# Altium PCB BEAR4.PcbDoc (part 2 of 3)
Units mm, origin at the board's own origin, x right, y up, seen from the top; angles counter-clockwise.
Board outline 83.43 x 40.25 mm, 4 copper layers (Top Layer, Layer 1, Layer 2, Bottom Layer), stack 0.8 mm thick; 156 components, 110 nets, 501 pads, 382 vias.
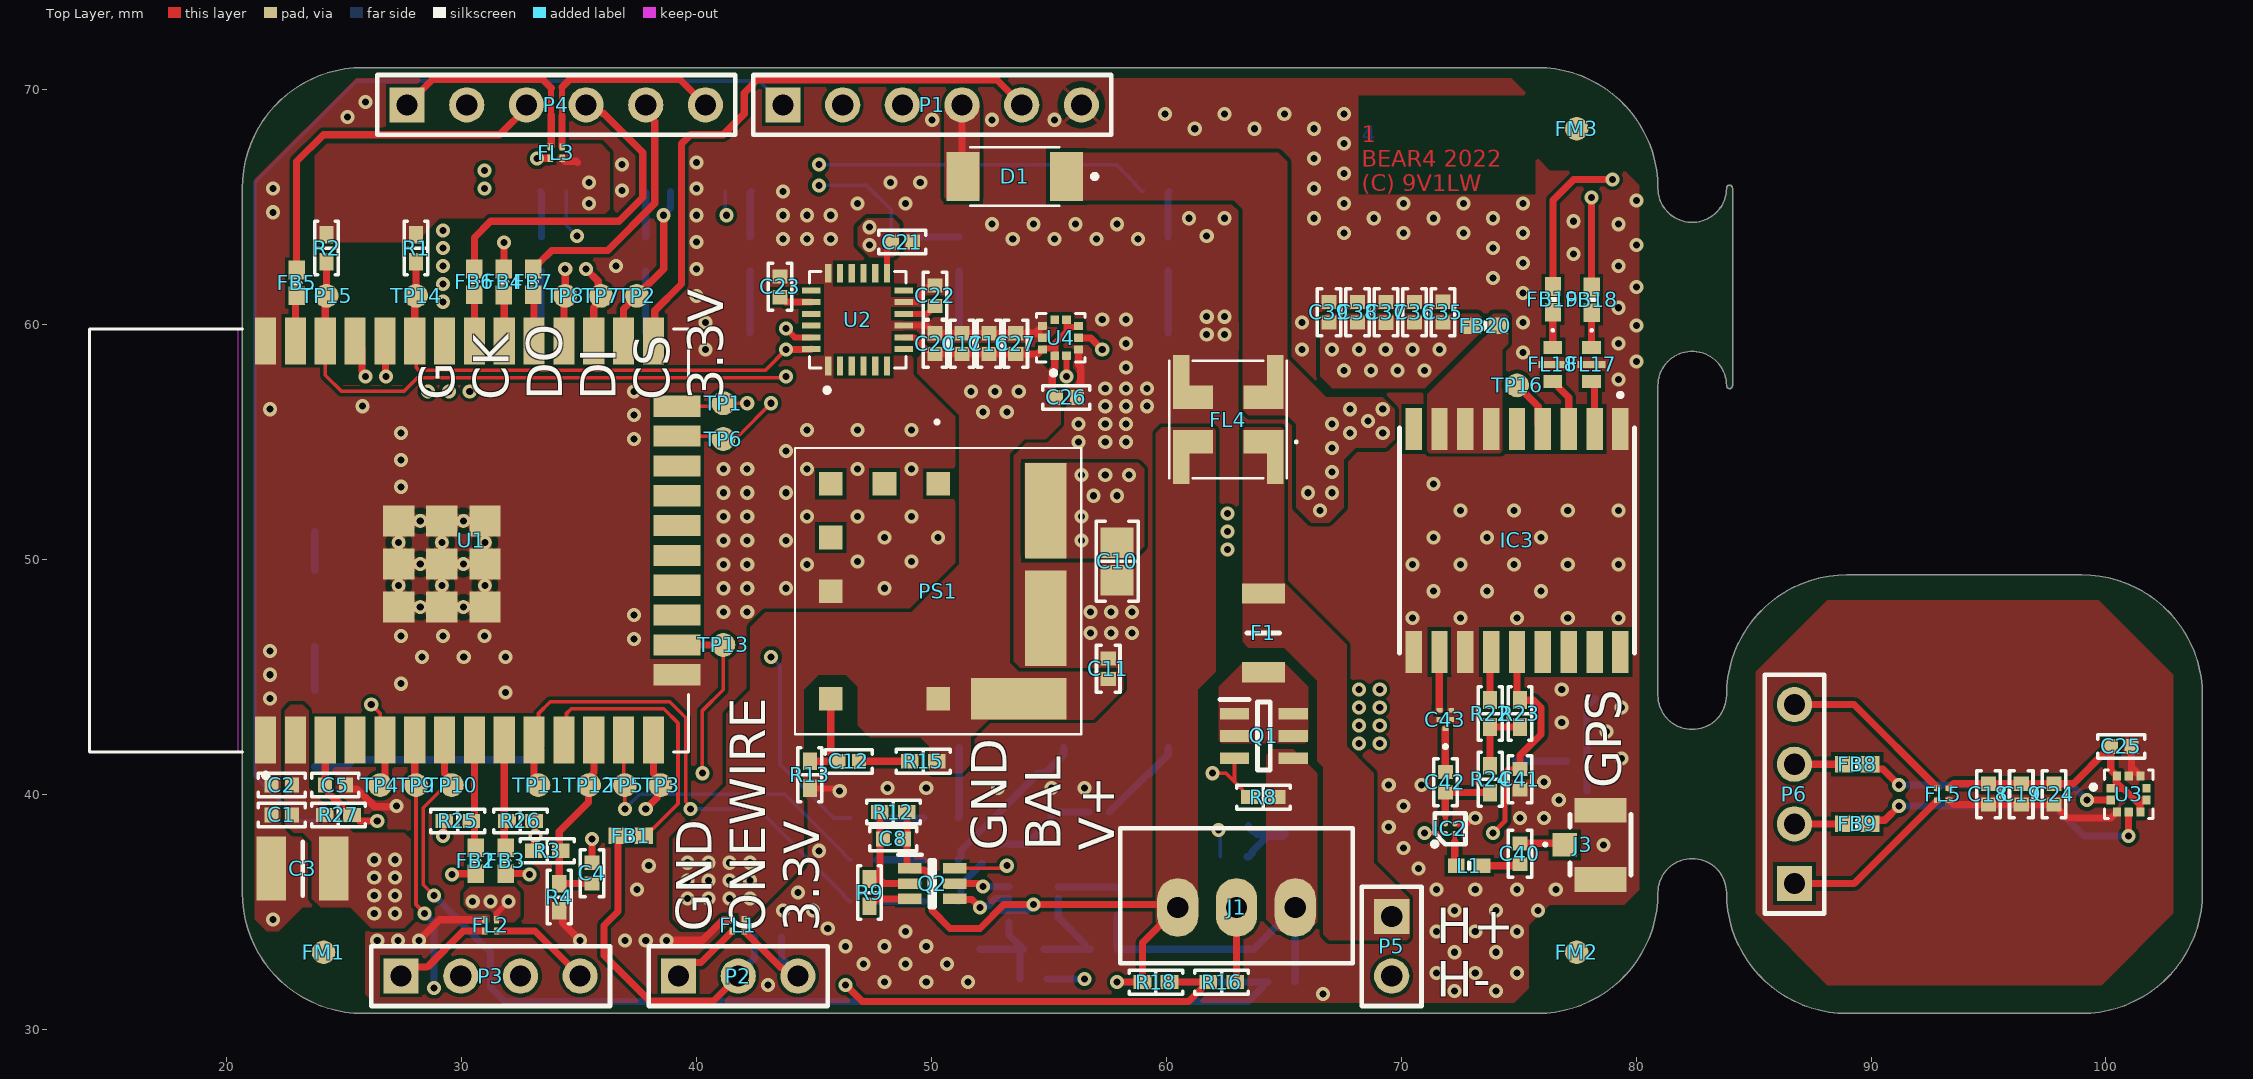
[diagram p0: Top Layer view]

## Via types
v1: diameter 0.6, hole 0.3, Top Layer to Bottom Layer, tented both sides, 382 vias

## Nets (pads, with @x,y where several pads share a name; then routed paths per layer and width w, separated by ;. In a path a pad name is that pad's centre, name@x,y a point inside that pad or via, vN(x,y) a via of type N, cw(c..) or ccw(c..) an arc to the next point about the centre after c; other vN are vias at no path point) (continued)
BATT_GND: (continued)
  Bottom Layer w0.305: C9.1@52.07,34.281 52.09,34.281 52.863,35.054 53.304,35.054 IC1.6@53.306,35.056 54.106,35.056 v1(54.356,35.306) ; v1(57.912,32.004) R19.1@58.988,32.004
BATT_PROTECTED: F1.2 FL4.1 FL4.5 P5.1
CELL1_V: R16.1 R18.1 TP9.1 U1.6 | length 46.6
  Top Layer w0.152: TP9.1@28.067,40.386 28.067,35.306 28.427,34.946 v1(28.427,34.925)
  Top Layer w0.305: U1.6@28.014,42.3 28.014,40.439 TP9.1@28.067,40.386 ; v1(46.355,31.877) 47.057,31.175 60.953,31.175 61.559,31.781 61.559,31.856 R16.1@61.707,32.004 ; R18.1@60.138,32.004 R16.1@61.707,32.004 ; R16.1@61.782,32.004 R16.1@61.707,32.004
  Layer 1 w0.305: v1(28.829,31.75) 29.404,31.175 45.653,31.175 v1(46.355,31.877)
  Bottom Layer w0.305: v1(28.427,34.925) 28.829,34.523 v1(28.829,31.75)
CELL2_V: R17.2 R19.2 TP10.1 U1.7 | length 50.3
  Top Layer w0.152: v1(28.829,35.687) 28.372,36.144 28.372,39.421 29.096,40.145 29.116,40.145 29.357,40.386 TP10.1@29.591,40.386
  Top Layer w0.305: U1.7@29.284,42.3 29.284,40.885 29.591,40.578 TP10.1@29.591,40.386
  Bottom Layer w0.305: v1(28.829,35.687) 31.242,33.274 31.242,31.78 31.847,31.175 63.493,31.175 64.099,31.781 64.099,31.856 R17.2@64.247,32.004 ; R19.2@60.138,32.004 R17.2@64.247,32.004 ; R17.2@64.322,32.004 R17.2@64.247,32.004
GND: C1.1 C2.1 C3.2 C5.1 C10.1 C11.1 C13.1 C14.1 C16.1 C17.1 C20.1 C21.1 C22.1 C23.1 C26.1 C27.1 C28.1 C29.1 C30.1 C31.1 C32.2 C33.2 C35.1 C36.1 C37.1 C38.1 C39.1 C41.1 C43.2 C43.3 C43.5 FL1.4 FL2.4 FL3.3 FL4.3 FL4.7 FL6.4 FL7.4 FL8.4 FL9.4 FL10.4 FL11.2 FL11.4 FL12.2 FL12.4 FL13.4 FL14.4 FL15.4 FL17.4 FL18.4 IC2.B2 IC3.1 IC3.10 IC3.12 J2.2 J2.3 J3.2 J3.3 P1.6 PS1.3 PS1.7 PS2.3 PS2.7 R4.1 R13.1 R20.2 R29.1 U1.1 U1.15 U1.38 U1.39_1 U1.39_2 U1.39_3 U1.39_4 U1.39_5 U1.39_6 U1.39_7 U1.39_8 U1.39_9 U1.39_10 U1.39_11 U1.39_12 U1.39_13 U1.39_14 U1.39_15 U1.39_16 U1.39_17 U1.39_18 U1.39_19 U1.39_20 U1.39_21 U2.1 U2.9 U2.11 U2.18 U4.3 U4.8 U4.9 U5.9 U5.10 U5.11 U5.P1 U5.P2 U5.P3 | length 23.9
  Top Layer w0.203: IC2.B2@72.282,38.735 72.835,38.735 73.089,38.989 v1(73.152,38.989)
  Top Layer w0.254: R13.1@44.831,40.252 45.887,40.252 46.007,40.132 v1(46.101,40.132) ; U2.9@48.833,59.948 49.823,59.948 49.972,59.799 C20.1@49.972,59.795 ; U2.11@48.833,60.948 49.381,60.948 49.53,61.097 49.53,61.341 49.784,61.595 50.106,61.595 C22.1@50.165,61.654
  Top Layer w0.305: C5.1@25.078,40.386 25.078,40.366 25.226,40.218 25.561,40.218 26.312,39.467 27.203,39.467 v1(27.233,39.497) ; v1(28.194,33.782) 29.069,34.657 FL2.4@30.992,34.657 ; v1(33.218,67.056) 33.232,67.07 FL3.3@33.786,67.07 ; R4.1@34.163,35.045 34.311,34.897 34.311,34.523 v1(35.052,33.782) ; v1(38.735,33.782) 40.259,33.782 41.134,34.657 FL1.4@41.533,34.657 ; C20.1@49.972,59.795 50.145,59.622 C20.1@50.165,59.622 C17.1@51.308,59.622 C16.1@52.451,59.622 C27.1@53.594,59.622 54.427,59.622 ; U4.9@54.738,59.433 54.723,59.433 54.534,59.622 54.427,59.622 ; U4.8@54.738,59.933 54.723,59.933 54.675,59.885 54.675,59.87 54.427,59.622 ; C26.1@56.193,56.896 56.341,57.044 56.341,57.517 56.358,57.534 56.358,58.178 56.268,58.267 U4.3@56.268,58.933
  other v1: 66.675,31.496 72.263,31.623 74.041,31.623 43.053,31.877 48.006,32.004 49.784,32.004 51.562,32.004 71.501,32.385 73.152,32.385 74.93,32.385 47.117,32.766 48.895,32.766 50.673,32.766 72.263,33.274 74.041,33.274 46.355,33.528 48.006,33.528 49.784,33.528 26.416,33.782 27.305,33.782 36.957,33.782 37.846,33.782 48.895,34.163 71.501,34.163 73.152,34.163 74.93,34.163 45.593,34.29 21.971,34.671 43.688,35.052 44.958,35.052 72.263,35.052 74.041,35.052 75.819,35.052 44.323,35.814 37.465,35.941 71.501,35.941 73.152,35.941 74.93,35.941 76.581,35.941 70.739,36.83 37.973,36.957 45.212,37.592 70.104,37.719 78.613,37.846 69.469,38.608 75.057,38.989 76.073,38.989 70.104,39.497 76.708,39.751 48.133,40.259 49.784,40.259 52.832,40.259 55.118,40.259 56.515,40.259 69.469,40.386 70.866,40.386 76.073,40.513 79.375,41.529 78.74,42.672 76.835,43.053 79.375,43.688 21.844,44.069 31.877,44.323 76.835,44.45 27.432,44.704 21.844,45.085 28.321,45.847 30.099,45.847 31.877,45.847 21.844,46.101 37.338,46.609 27.432,46.736 29.21,46.736 30.988,46.736 56.769,46.863 57.658,46.863 58.547,46.863 70.485,47.498 72.517,47.498 74.93,47.498 77.089,47.498 79.248,47.498 37.338,47.625 41.148,47.752 42.164,47.752 56.769,47.752 57.658,47.752 58.547,47.752 71.374,48.641 73.66,48.641 75.946,48.641 41.148,48.768 42.164,48.768 43.815,48.768 48.006,48.768 41.148,49.784 42.164,49.784 44.704,49.784 70.485,49.784 72.517,49.784 74.803,49.784 77.089,49.784 79.248,49.784 46.863,49.911 49.149,49.911 41.148,50.8 42.164,50.8 43.815,50.8 48.006,50.927 50.292,50.927 71.374,50.927 73.66,50.927 75.946,50.927 41.148,51.816 42.164,51.816 44.704,51.816 46.863,51.816 49.149,51.816 72.517,52.07 74.803,52.07 77.089,52.07 79.248,52.07 41.148,52.832 42.164,52.832 43.815,52.832 27.432,53.086 71.374,53.213 41.148,53.848 42.164,53.848 44.704,53.848 46.863,53.848 49.149,53.848 27.432,54.229 43.815,54.61 56.261,54.991 57.404,54.991 58.293,54.991 37.338,55.118 27.432,55.372 44.704,55.499 46.863,55.499 49.149,55.499 56.261,55.753 57.404,55.753 58.293,55.753 37.338,56.134 21.844,56.388 25.781,56.515 57.404,56.515 58.293,56.515 59.182,56.515 37.338,57.15 57.404,57.277 58.293,57.277 59.182,57.277 79.248,57.658 58.293,58.166 80.01,58.42 75.184,58.801 40.386,58.928 65.786,58.928 58.293,59.182 79.248,59.182 61.722,59.563 62.484,59.563 80.01,59.944 40.386,60.071 65.786,60.071 75.184,60.071 57.277,60.198 58.293,60.198 61.722,60.325 62.484,60.325 79.248,60.706 40.005,61.214 75.184,61.341 80.01,61.595 73.914,61.976 40.005,62.357 36.576,62.484 79.248,62.484 75.184,62.611 77.343,62.992 73.914,63.246 80.01,63.373 40.005,63.5 43.688,63.627 44.704,63.627 45.72,63.627 53.467,63.627 55.245,63.627 57.023,63.627 58.801,63.627 61.722,63.754 67.564,63.881 70.104,63.881 72.644,63.881 75.184,63.881 52.578,64.262 54.356,64.262 56.134,64.262 57.912,64.262 79.248,64.262 77.343,64.389 60.96,64.516 62.484,64.516 66.294,64.516 68.834,64.516 71.374,64.516 73.914,64.516 40.005,64.643 43.688,64.643 44.704,64.643 45.72,64.643 21.971,64.77 46.863,65.151 48.895,65.151 67.564,65.151 70.104,65.151 72.644,65.151 75.184,65.151 80.01,65.278 43.688,65.659 36.83,65.705 21.971,65.786 30.988,65.786 40.005,65.786 66.294,65.786 48.26,66.04 49.53,66.04 67.564,66.421 30.988,66.548 36.83,66.802 40.005,66.883 66.294,67.056 67.564,67.691 61.214,68.326 63.754,68.326 66.294,68.326 50.038,68.707 52.578,68.707 55.245,68.707 25.146,68.834 59.944,68.961 62.484,68.961 65.024,68.961 67.564,68.961 25.908,69.469
GPS_PPS: IC3.4 TP16.1 | length 2.3
  Top Layer w0.305: TP16.1@74.93,57.404 75.832,56.502 75.832,55.748 IC3.4@76.03,55.55
GPS_SIG_AMP: C42.2 IC2.A2 R24.1 | length 3.2
  Top Layer w0.203: IC2.A2@71.882,38.735 71.882,39.116
  Top Layer w0.318: 71.882,39.116 C42.2@71.882,40.073 73.779,40.073 R24.1@73.787,40.065
GPS_SIG_FILT: C43.4 IC3.11 | length 2.5
  Top Layer w0.318: IC3.11@71.63,46.05 71.63,43.817 71.628,43.815 71.628,43.595 C43.4@71.632,43.591
GPS_VCC_3V3_FILT: FB20.2 IC3.6 IC3.7 IC3.8